# Altium PCB PCB.PcbDoc
Units mil, origin at the board's own origin, x right, y up, seen from the top; angles counter-clockwise.
Board outline 3785 x 1995 mil, 2 copper layers (Top Layer, Bottom Layer); 58 components, 44 nets, 203 pads, 0 vias.
Unrouted connection lines stored in the file: 107.
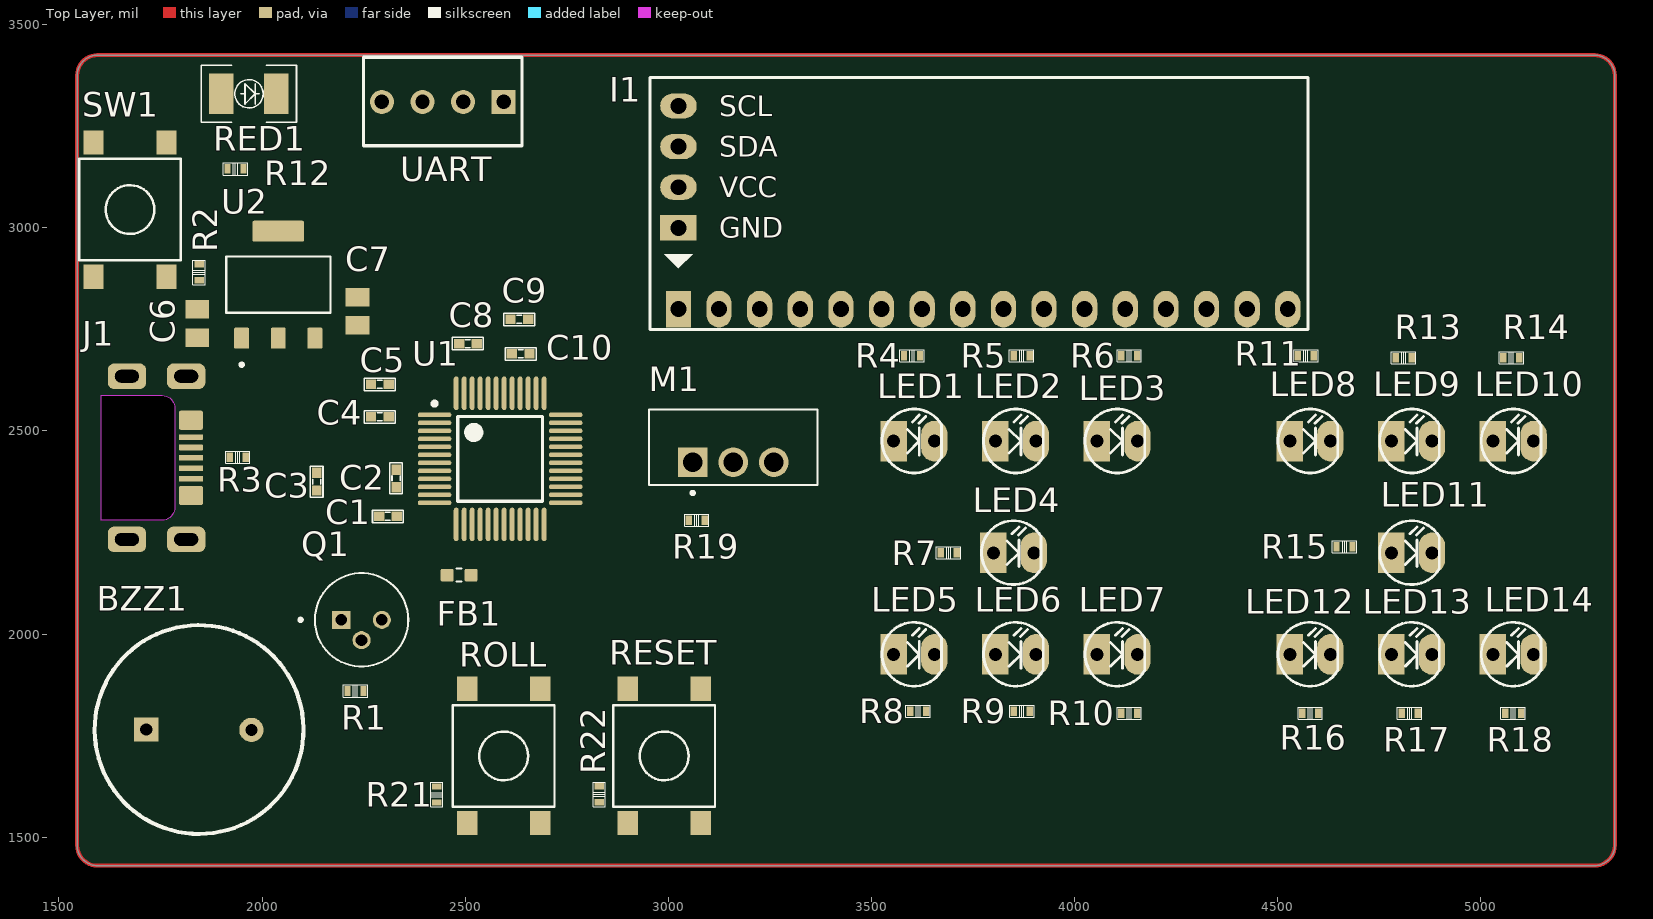
[diagram p0: Top Layer view]
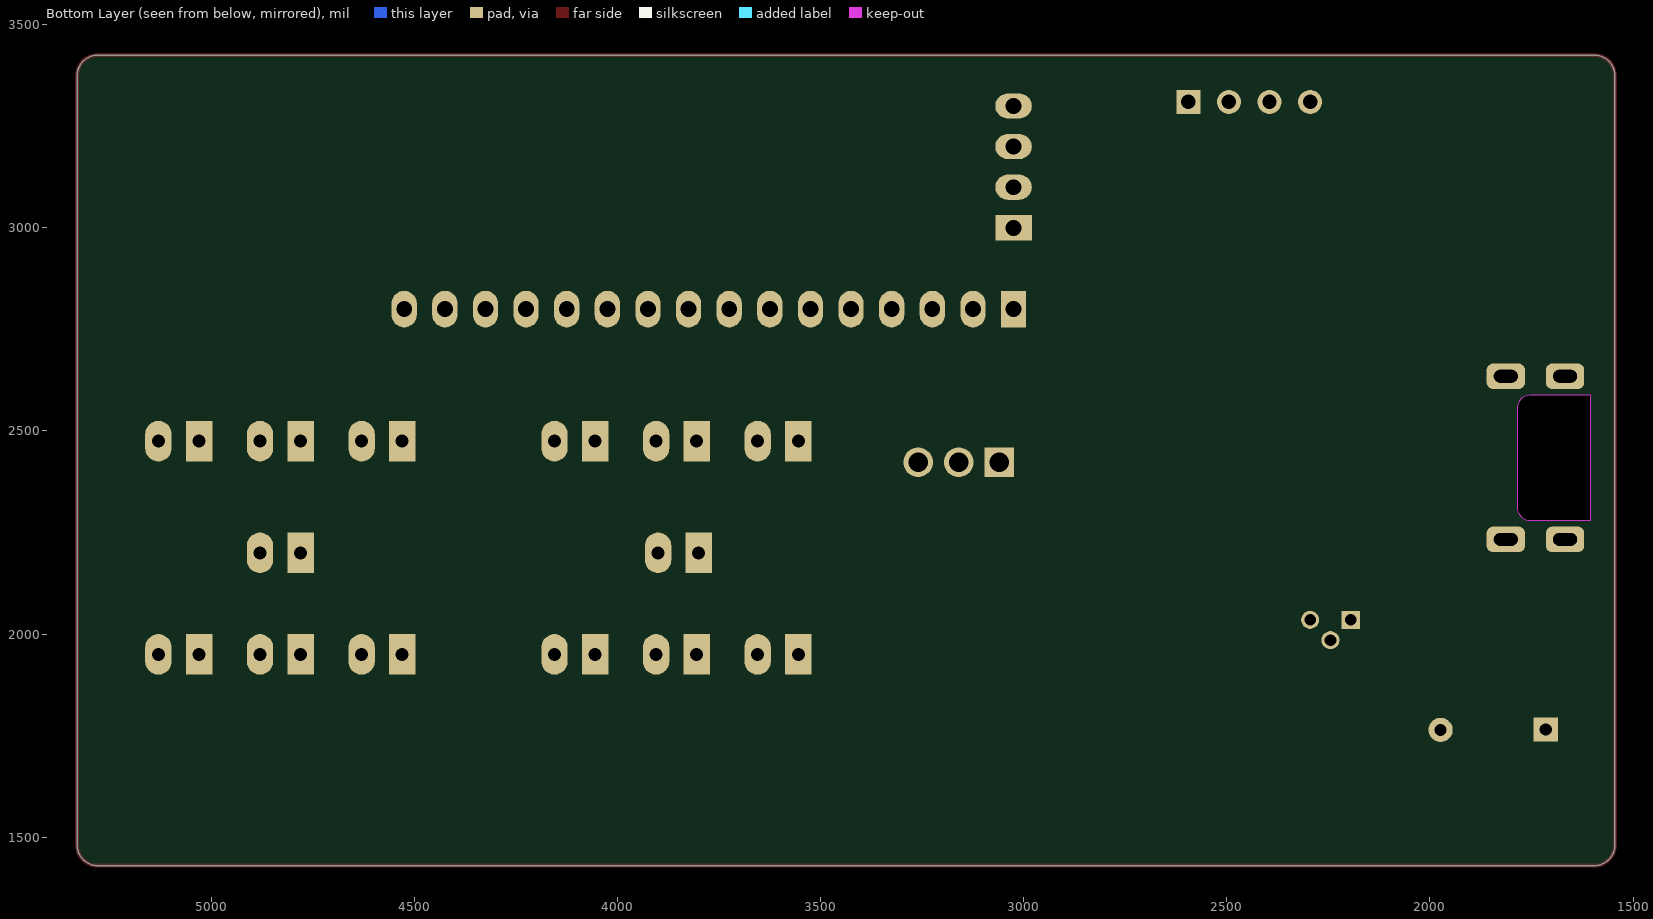
[diagram p1: Bottom Layer view, seen from below]

## Layer stack, top to bottom
Top Solder: solder mask 0.4, Solder Resist, Dk 3.5
Top Layer: signal copper 1.4
Dielectric 1: dielectric 12.6, FR-4, Dk 4.8
Bottom Layer: signal copper 1.4
Bottom Solder: solder mask 0.4, Solder Resist, Dk 3.5

## Board outline
1545,1480 1545,3375 cw(c1595,3375) 1595,3425 5280,3425 cw(c5280,3375) 5330,3375 5330,1480 cw(c5280,1480) 5280,1430 1595,1430 cw(c1595,1480)

## Design rules (kind name [scope] priority, off if disabled: settings)
Clearance [All] p1: gap=10 ignorepadtopadclearanceinfootprint=FALSE
PolygonConnect [All] p1: connectstyle=Relief reliefconductorwidth=10 reliefentries=4 polygonreliefangle="90 Angle" airgapwidth=10
RoutingVias [All] p1: holewidth=28 width=50 viastyle="Through Hole" minholewidth=28 minwidth=50 maxholewidth=28 maxwidth=50
SolderMaskExpansion [All] p1: expansion=4 istentingtop=FALSE
SupplyNets "Schematic Supply Nets_4" [InNet('VBUS')] p1: voltage=0.000
SupplyNets "Schematic Supply Nets_3" [InNet('+5')] p2: voltage=0.000
SupplyNets "Schematic Supply Nets_2" [InNet('+3.3V')] p3: voltage=0.000
SupplyNets "Schematic Supply Nets_1" [InNet('+3.3Va')] p4: voltage=0.000
SupplyNets "Schematic Supply Nets" [InNet('GND')] p5: voltage=0.000
Width [All] p1: maxlimit=10 minlimit=10 preferedwidth=10
30 further rules are at their usual default settings.

## Components (designator, comment, footprint, x,y, rotation, side; value= is the part's Value field where it differs from the comment)
BZZ1 "Buzzer" "buzzer 5V" 1845,1765 r0 top
C1 "Capacitor" "tu 0402" 2310,2290 r180 top value=100n
C2 "Capacitor" "tu 0402" 2330,2383.35 r90 top value=10u
C3 "Capacitor" "tu 0402" 2135,2375 r90 top value=100n
C4 "Capacitor" "tu 0402" 2290,2535 r180 top value=100n
C5 "Capacitor" "tu 0402" 2290,2615 r180 top value=100n
C6 "Capacitor" CAPC2012X94N 1840,2764.65 r90 top value=22u
C7 "Capacitor" CAPC2012X94N 2235,2795 r90 top value=22u
C8 "Capacitor" "tu 0402" 2506.65,2715 r0 top value=1u
C9 "Capacitor" "tu 0402" 2633.35,2775 r180 top value=1u
C10 "Capacitor" "tu 0402" 2636.65,2690 r180 top value=10n
FB1 "2K2 @ 100 MHz" FBC1608X95N 2485,2145 r0 top
I1 "I2C-LCD16x2" I2C-LCD16X2 3025,2800 r0 top value=LCD16x2A
J1 "USB M" USB-Micr-B-FCI-SMD 1604.53,2433.82 r270 top
LED1 "LED" LED-3 3555,2475 r0 top value="LED 3 ly Single Colour"
LED2 "LED" LED-3 3805,2475 r0 top value="LED 3 ly Single Colour"
LED3 "LED" LED-3 4055,2475 r0 top value="LED 3 ly Single Colour"
LED4 "LED" LED-3 3800,2200 r0 top value="LED 3 ly Single Colour"
LED5 "LED" LED-3 3555,1950 r0 top value="LED 3 ly Single Colour"
LED6 "LED" LED-3 3805,1950 r0 top value="LED 3 ly Single Colour"
LED7 "LED" LED-3 4055,1950 r0 top value="LED 3 ly Single Colour"
LED8 "LED" LED-3 4530,2475 r0 top value="LED 3 ly Single Colour"
LED9 "LED" LED-3 4780,2475 r0 top value="LED 3 ly Single Colour"
LED10 "LED" LED-3 5030,2475 r0 top value="LED 3 ly Single Colour"
LED11 "LED" LED-3 4780,2200 r0 top value="LED 3 ly Single Colour"
LED12 "LED" LED-3 4530,1950 r0 top value="LED 3 ly Single Colour"
LED13 "LED" LED-3 4780,1950 r0 top value="LED 3 ly Single Colour"
LED14 "LED" LED-3 5030,1950 r0 top value="LED 3 ly Single Colour"
M1 "N-channel MOS1 MOSFET Shichman and Hodges Model" TO254P1054X469X1930-3 3160,2460 r0 top
Q1 "2N2222A" TO127P584H533-3 2245,2035 r0 top
R1 "1K" RES-SMD-0402 2230,1860 r0 top
R2 "Thick Film" RES-SMD-0402 1845.01,2890.32 r90 top value=1k5
R3 "Thick Film" RES-SMD-0402 1940.31,2435.01 r180 top value=1k5
R4 "220" RES-SMD-0402 3600,2685 r0 top
R5 "220" RES-SMD-0402 3869.69,2684.99 r0 top
R6 "220" RES-SMD-0402 4134.69,2684.99 r0 top
R7 "220" RES-SMD-0402 3690,2200 r0 top
R8 "220" RES-SMD-0402 3615,1810 r0 top
R9 "220" RES-SMD-0402 3870.32,1809.99 r0 top
R10 "220" RES-SMD-0402 4134.69,1805.01 r180 top
R11 "220" RES-SMD-0402 4569.69,2685.01 r180 top
R12 "Thick Film" RES-SMD-0402 1934.68,3145.01 r180 top value=10K
R13 "220" RES-SMD-0402 4810,2680 r180 top
R14 "220" RES-SMD-0402 5075.31,2680.01 r180 top
R15 "220" RES-SMD-0402 4664.69,2215.01 r180 top
R16 "220" RES-SMD-0402 4580.31,1805.01 r180 top
R17 "220" RES-SMD-0402 4825,1805 r180 top
R18 "220" RES-SMD-0402 5079.69,1804.99 r0 top
R19 "Resistor" RES-SMD-0402 3070,2280 r180 top value=10K
R21 "Resistor" RES-SMD-0402 2430,1605 r90 top value=10K
R22 "Resistor" RES-SMD-0402 2830.01,1605.32 r90 top value=10K
RED1 "Light-Emitting Diode" LED-RED-0805 1900,3330 r0 top
RESET "Push Button Normally Opened" SW4_SMD 2990,1700 r90 top (schematic designator S2)
ROLL "Push Button Normally Opened" SW4_SMD 2595,1700 r90 top (schematic designator S1)
SW1 "ON-ON" SW4_SMD 1675,3045 r90 top
U1 "STM32F103C8T6TR" STM-LQFP48_M 2586.1,2431.42 r0 top
U2 "Positive Fixed Voltage regulator" AMS1117_3v3 2020,2865 r90 top
UART "USART" HDR4 2595,3310 r180 top (schematic designator C11)

## Footprints (in the part's own frame and the unit in brackets; to place one, negate y for a bottom-side part, rotate by r counter-clockwise, add the part's x,y. Pads: shape width x height; smd on the part's side, far side on the other; paste and mask are expansions set on the pad)
AMS1117_3v3 [mm]
  rrect15% 1.31x0.93 smd: 1(-3.472,1.782) 2(-3.472,-0.508) 3(-3.472,-2.798)
  rrect15% 1.31x3.24 smd: 4(3.218,-0.508)
  silkscreen extent -5.23,-3.76 1.63,2.74, body extent -3.63,-3.76 3.37,2.74, height 1.8
"buzzer 5V" [mil]
  rect 60x60 hole 30: 1(-130,0)
  round 60 hole 30: 2(129,-1)
  silkscreen extent -257,-257 257,257, body extent -236,-236 236,236, height 345
CAPC2012X94N [mm]
  rect 1.16x1.47 smd: 1(-0.88,0) 2(0.88,0)
  body extent -1,-0.63 1,0.63, height 0.94
FBC1608X95N [mm] "Chip Ferrite, Body 1.6x0.8mm, 0603, IPC Medium Density"
  round 0.254 on Mech15: 0(0,0)
  rrect25% 0.8x0.8 smd: 1(-0.75,0) 2(0.75,0)
  Top Layer pour cut-out: -0.6,0.5 -0.4,0.7 0.4,0.7 0.6,0.5 0.6,-0.5 0.4,-0.7 -0.4,-0.7 -0.6,-0.5
  silkscreen extent -0.15,-0.41 0.15,0.41, body extent -0.87,-0.47 0.88,0.48, height 0.95
HDR4 [mm] "Connector; Header; 4 Position"
  rect 1.5x1.5 hole 0.9: 1(0,0)
  round 1.5 hole 0.9: 2(2.54,0) 3(5.08,0) 4(7.62,0)
  silkscreen extent -1.14,-2.79 8.76,2.74, body extent -1.27,-2.92 8.89,2.88, height 11.72
I2C-LCD16X2 [mil] "LCD dipslay 16x2, 16 pin"
  rect 62x90 hole 39: 1(0,0)
  oval 62x90 hole 39: 2(100,0) 3(200,0) 4(300,0) 5(400,0) 6(500,0) 7(600,0) 8(700,0) 9(800,0) 10(900,0) 11(1000,0) 12(1100,0) 13(1200,0) 14(1300,0) 15(1400,0) 16(1500,0)
  oval 90x62 hole 39: 17(0,500) 18(0,400) 19(0,300)
  rect 90x62 hole 39: 20(0,200)
  silkscreen extent -70,-50 1550,570
LED-3 [mil] "LED 2 PIN, 3ly Only colour"
  rect 65x100 hole 32: 1(0,0)
  oval 65x100 hole 32: 2(100,0)
  silkscreen extent -29,-78 118,79, body extent -29,-75 109,75, height 256
LED-RED-0805 [mil]
  rect 60x100 smd: 1(0,0) 2(135,0)
  silkscreen extent -50,-70 185,70, body extent -20,-60 154,60, height 75
RES-SMD-0402 [mm]
  rect 0.4x0.6 smd: 1(-0.5,0) 2(0.5,0)
  silkscreen extent -0.76,-0.38 0.76,0.38, body extent -0.5,-0.25 0.5,0.25, height 0.35
STM-LQFP48_M [mm] "QFP, 48-Leads, Body 7x7mm, Pitch 0.5mm, IPC Low Density"
  oval 2.1x0.3 smd: 1(-4.1,2.75) 2(-4.1,2.25) 3(-4.1,1.75) 4(-4.1,1.25) 5(-4.1,0.75) 6(-4.1,0.25) 7(-4.1,-0.25) 8(-4.1,-0.75) 9(-4.1,-1.25) 10(-4.1,-1.75) 11(-4.1,-2.25) 12(-4.1,-2.75) 25(4.1,-2.75) 26(4.1,-2.25) 27(4.1,-1.75) 28(4.1,-1.25) 29(4.1,-0.75) 30(4.1,-0.25) 31(4.1,0.25) 32(4.1,0.75) 33(4.1,1.25) 34(4.1,1.75) 35(4.1,2.25) 36(4.1,2.75)
  oval 0.3x2.1 smd: 13(-2.75,-4.1) 14(-2.25,-4.1) 15(-1.75,-4.1) 16(-1.25,-4.1) 17(-0.75,-4.1) 18(-0.25,-4.1) 19(0.25,-4.1) 20(0.75,-4.1) 21(1.25,-4.1) 22(1.75,-4.1) 23(2.25,-4.1) 24(2.75,-4.1) 37(2.75,4.1) 38(2.25,4.1) 39(1.75,4.1) 40(1.25,4.1) 41(0.75,4.1) 42(0.25,4.1) 43(-0.25,4.1) 44(-0.75,4.1) 45(-1.25,4.1) 46(-1.75,4.1) 47(-2.25,4.1) 48(-2.75,4.1)
  silkscreen extent -4.22,-2.65 2.65,3.57, body extent -4.51,-4.51 4.51,4.51, height 1.6
SW4_SMD [mil] "SW SMD button 4pin, 250 x250 mil"
  rect 60x50 smd: 1(-165,90) 2(165,-90) 3(165,90) 4(-165,-90)
  silkscreen extent -125,-125 125,125, body extent -180,-125 180,125, height 130
TO127P584H533-3 [mm]
  rect 1.13x1.13 / inner round 1.13 / far side rect 1.13x1.13 hole 0.73 mask+0.102: 1(-1.27,0)
  round 1.13 hole 0.73 mask+0.102: 2(0,-1.27) 3(1.27,0)
  silkscreen extent -3.91,-2.92 2.92,2.92, body extent -3.02,-2.79 2.79,3.02, height 5.33
TO254P1054X469X1930-3 [mm]
  rect 1.85x1.85 / inner round 1.85 / far side rect 1.85x1.85 hole 1.23: 1(-2.54,-0.94)
  round 1.85 hole 1.23: 2(0,-0.94) 3(2.54,-0.94)
  silkscreen extent -5.27,-2.96 5.27,2.35, body extent -5.08,-1.71 5.08,2.73, height 15.01
"tu 0402" [mm]
  rect 0.65x0.6 smd: 1(-0.55,0) 2(0.55,0)
  silkscreen extent -0.97,-0.38 0.97,0.41, body extent -0.5,-0.27 0.5,0.26, height 0.35
USB-Micr-B-FCI-SMD [mm]
  round 0.508 on Mech15: 0(0,0)
  rrect20% 0.35x1.5 smd: 1(-1.3,5.6) 2(-0.65,5.6) 3(0,5.6) 4(0.65,5.6) 5(1.3,5.6)
  rrect50% 1.6x2.4 hole 0.8 slot 1.5 at 90 deg: SH(-5.1,5.3) SH(-5.1,1.6) SH(5.1,5.3) SH(5.1,1.6)
  rrect20% 1.2x1.5 smd: SH(-2.35,5.6) SH(2.35,5.6)
  Keep-Out Layer board cut-out: -3.9,0 -3.9,3.797 -3.839,4.103 -3.666,4.362 -3.406,4.536 -3.1,4.597 -3.1,4.597 3.1,4.597 3.406,4.536 3.666,4.362 3.839,4.103 3.9,3.797 3.9,3.797 3.9,0
  body extent -5.25,-1.12 5.25,5.8, height 2.15

## Part data
FB1: library part FERRITE_2K2-100MHz_0603, "Ferrite bead 120 Ohm at 100 MHz 200mA 0603 SMD", Current Rating=200mA, DC Resistance (DCR)="800 mOhm Max", Impedance @ Frequency="2200 Ohm @ 100MHz", Manufacturer 1="TDK Corporation", Manufacturer Part Number 1=MMZ1608A222B, Package / Case="0603 (1608 Metric)", Ratings="200 mA; 800 mOhm DC", Supplier Part Number 1=445-8671-1-ND, ComponentLink1Description=http://www.tdk.co.jp/tefe02/e9412_mmz.pdf, ComponentLink1URL=http://www.tdk.co.jp/tefe02/e9412_mmz.pdf, Filter Type="Differential Mode - Single", Height (Max)="0.037\" (0.95mm)", Mounting Type="Surface Mount", RoHS 1="RoHS Compliant", SCDType=source, Size / Dimension="0.063\" L x 0.031\" W (1.60mm x 0.80mm)", Supplier 1=Digi-Key
I1: "LCD dipslay 16 char, 2 line"
LED1 LED2 LED3 LED4 LED5 LED6 LED7 LED8 LED9 LED10 LED11 LED12 LED13 LED14: "LED Single colour Green and Red"
M1: library part "MOSFET N-ch Lev1", CBD=0, CBS=0, CGBO=0, CGDO=0, CGSO=0, CJ=0, CJSW=0, FC=0.5, GAMMA=0, IS=1e-14, JS=0, KP=2e-05, LAMBDA=0, LD=0, MJ=0.5, MJSW=0.5, NSS=0, NSUB=0, PB=0.8, PHI=0.6, RD=0, RS=0, RSH=0, SimulationGenericComponent=True, TNOM=27, TOX=0, TPG=0, U0=0, VTO=0
Q1: "Bipolar (BJT) Transistor NPN 50 V 800 mA - 500 mW Surface Mount 4-SMD", PACKAGE=None, Check_prices=https://www.snapeda.com/parts/2N2222A/Microsemi/view-part/?ref=eda, MF="Microsemi Corporation", MP=2N2222A, SnapEDA_Link=https://www.snapeda.com/parts/2N2222A/Microsemi/view-part/?ref=snap
R1 R4 R5 R6 R7 R8 R9 R10 R11 R13 R14 R15 R16 R17 R18: library part Res, "Res"
R2 R3 R12: library part RES_0402, "Resistor SMD chip 1k Ohm 0.063W 5% 0402", Manufacturer 1=Yageo, Manufacturer 2="Vishay Dale", Manufacturer 3="Samsung Electro-Mechanics America, Inc", Manufacturer 4="Rohm Semiconductor", Manufacturer 5="Panasonic Electronic Components", Manufacturer Part Number 1=RC0402JR-071KL, Manufacturer Part Number 2=CRCW04021K00JNED, Manufacturer Part Number 3=RC1005J102CS, Manufacturer Part Number 4=MCR01MRTJ102, Manufacturer Part Number 5=ERJ-2GEJ102X, Package / Case="0402 (1005 Metric)", Ratings="1/16 W", Supplier Part Number 1=311-1.0KJRCT-ND, Tolerance=±5%, ComponentLink1Description=http://www.yageo.com/documents/recent/PYu-RC0402_51_RoHS_L_6.pdf, ComponentLink1URL=http://www.yageo.com/documents/recent/PYu-RC0402_51_RoHS_L_6.pdf, ComponentLink2Description=http://www.vishay.com/doc?20035, ComponentLink2URL=http://www.vishay.com/doc?20035, ComponentLink3Description=http://www.samsungsem.com/servlet/FileDownload?filename=productcatalog/pdf/Chip_Resistor.pdf, ComponentLink3URL=http://www.samsungsem.com/servlet/FileDownload?filename=productcatalog/pdf/Chip_Resistor.pdf, ComponentLink4Description=http://rohmfs.rohm.com/en/products/databook/datasheet/passive/resistor/chip_resistor/mcr_g.pdf, ComponentLink4URL=http://rohmfs.rohm.com/en/products/databook/datasheet/passive/resistor/chip_resistor/mcr_g.pdf, ComponentLink5Description=http://industrial.panasonic.com/www-cgi/jvcr13pz.cgi?E+PZ+3+AOA0001+ERJ2GEJ102X+7+WW, ComponentLink5URL=http://industrial.panasonic.com/www-cgi/jvcr13pz.cgi?E+PZ+3+AOA0001+ERJ2GEJ102X+7+WW, RoHS 1="RoHS Compliant", RoHS 2="RoHS Compliant", RoHS 3="RoHS Compliant", RoHS 4="RoHS Compliant", RoHS 5="RoHS Compliant", SCDType=spec, Supplier 1=Digi-Key, Supplier 2=Digi-Key, Supplier 3=Digi-Key, Supplier 4=Digi-Key, Supplier 5=Digi-Key, Supplier Part Number 2=541-1.0KJCT-ND, Supplier Part Number 3=1276-4376-1-ND, Supplier Part Number 4=RHM1.0KCECT-ND, Supplier Part Number 5=P1.0KJCT-ND
RED1: library part LED, AF=1, BV=0, BV_MAX=1e99, CJO=0, CJP=0, CTA=0, CTP=0, EG=1.11, FC=0.5, FCS=0.5, FV_MAX=1e99, IBV=0.001, IKF=0, IKR=0, IS=1e-14, ISR=1e-14, JSW=0, JTUN=0, JTUNSW=0, KEG=1, KF=0, LEVEL=1, MJSW=0.33, N=1, NBV=1, NR=1, NS=1, NTUN=30, PHP=1, RS=0, SimulationGenericComponent=True, TCV=0, TLEV=0, TLEVC=0, TM1=0, TM2=0, TNOM=27, TPB=0, TPHP=0, TRS=0, TRS2=0, TT=0, TTT1=0, TTT2=0, VJ=1, XTI=3, XTITUN=3
RESET ROLL: library part "Push Button NO", closed=0, Rclosed=1m, Ropen=1Meg, SimulationGenericComponent=True
SW1: library part SW_THD_SPDT_On-On, "Switch THD vertical toggle SPDT", Contact Rating @ Voltage="0.25A @ 125VAC", Manufacturer 1="TE Connectivity", Manufacturer Part Number 1=SLS121PC04, Supplier Part Number 1=450-1598-ND, Circuit=SPDT, Mounting Type="PCB mount", SCDType=spec, Supplier 1=Digi-Key, Switch Function=On-On
U1: "ARM Cortex-M3 32-bit MCU, 64 KB Flash, 20 KB Internal RAM, 37 I/Os, 48-pin LQFP, -40 to 85 degC, Tape and Reel", PACKAGE=LQFP48
U2: library part "Linear Voltage Regulator (Fixed)", R1_Value=1020, Av_feedback=1665, SimulationGenericComponent=True
UART: library part Header4, "Header IDC, 4 x 1 Pin Vertical 2.54mm Pitch (Non-Boxed, Male)", Manufacturer="W¨¹rth Elektronik eiSos GmbH", partNo=613002143121, ComponentLink1 Description=Manufacturer, ComponentLink1URL=http://www.we-online.com, ComponentLink2 Description=Datasheet, ComponentLink2URL=http://katalog.we-online.de/em/datasheet/6130xx143121.pdf, Created by="Karrer Zheng", Created Date="29 March 2013", NoPins=02
C1 C2 C3 C4 C5 C6 C7 C8 C9 C10: SimulationGenericComponent=True
R19 R21 R22: SimulationGenericComponent=True, TC1=0, TC2=0

## Nets (pads, with @x,y where several pads share a name; then routed paths per layer and width w, separated by ;. In a path a pad name is that pad's centre, name@x,y a point inside that pad or via, vN(x,y) a via of type N, cw(c..) or ccw(c..) an arc to the next point about the centre after c; other vN are vias at no path point)
+3.3V: BZZ1.1 C1.1 C2.1 C3.1 C4.1 C5.1 C7.1 C8.1 FB1.2 R3.1 RED1.1 SW1.3 U1.1 U1.24 U1.36 U1.48 U2.3 UART.1
+3.3Va: C9.1 C10.1 FB1.1 U1.9
+5: I1.19 RESET.2 ROLL.2
BUTT_1: R21.2 ROLL.1 U1.13
BUTT_2: R22.2 RESET.1 U1.14
BZZ: R1.2 U1.20
GND: C6.2 C7.2 C8.2 C9.2 C10.2 I1.20 J1.5 M1.3 Q1.1 R2.1 R21.1 R22.1 SW1.1 U1.8 U1.23 U1.35 U1.47 U2.2 UART.4
I2C_SCL: I1.17 I1.18 U1.42
I2C_SDA: U1.43
LED_1: R4.2 R7.2 U1.46
LED_2: R5.2 R8.2 U1.21
LED_3: R6.2 R9.2 U1.22
LED_4: R10.2 R11.2 U1.25
LED_5: R13.1 R16.1 U1.26
LED_6: R14.1 R17.1 U1.27
LED_7: R15.1 R18.1 U1.28
MOS: R19.2 U1.18
NetBZZ1_2: BZZ1.2 Q1.3
NetC1_2: C1.2 C2.2 C3.2 C4.2 C5.2
NetC11_2: U1.30 UART.2
NetC11_3: U1.31 UART.3
NetLED1_1: LED1.1 R4.1
NetLED1_2: LED1.2 LED2.2 LED3.2 LED4.2 LED5.2 LED6.2 LED7.2 LED8.2 LED9.2 LED10.2 LED11.2 LED12.2 LED13.2 LED14.2 M1.1
NetLED2_1: LED2.1 R5.1
NetLED3_1: LED3.1 R6.1
NetLED4_1: LED4.1 R7.1
NetLED5_1: LED5.1 R8.1
NetLED6_1: LED6.1 R9.1
NetLED7_1: LED7.1 R10.1
NetLED8_1: LED8.1 R11.1
NetLED9_1: LED9.1 R13.2
NetLED10_1: LED10.1 R14.2
NetLED11_1: LED11.1 R15.2
NetLED12_1: LED12.1 R16.2
NetLED13_1: LED13.1 R17.2
NetLED14_1: LED14.1 R18.2
NetM1_2: M1.2 R19.1
NetQ1_2: Q1.2 R1.1
NetR2_2: R2.2 RED1.2
NetR12_1: R12.1 U1.44
SW_BOOT0: R12.2 SW1.2
USB_D_N: J1.2 U1.32
USB_D_P: J1.3 R3.2 U1.33
VBUS: C6.1 J1.1 U2.1
pads on no net: FB1.0 I1.1 I1.2 I1.3 I1.4 I1.5 I1.6 I1.7 I1.8 I1.9 I1.10 I1.11 I1.12 I1.13 I1.14 I1.15 I1.16 J1.0 J1.4 J1.SH RESET.3 RESET.4 ROLL.3 ROLL.4 SW1.4 U1.2 U1.3 U1.4 U1.5 U1.6 U1.7 U1.10 U1.11 U1.12 U1.15 U1.16 U1.17 U1.19 U1.29 U1.34 U1.37 U1.38 U1.39 U1.40 U1.41 U1.45 U2.4
copper on no net: | length 11474.2
  Top Layer w10: 1545,1480 ccw(c1595,1480) 1595,1430 1605,1430 5280,1430 ccw(c5280,1480) 5330,1480 5330,3375 ccw(c5280,3375) 5280,3425 1595,3425 ccw(c1595,3375) 1545,3375 1545,1480

## Text inside footprints (layer, text, board x,y; h text height)
I1: Top Overlay "SCL" at 3125,3275 h50; Top Overlay "SDA" at 3125,3175 h50; Top Overlay "VCC" at 3125,3075 h50; Top Overlay "GND" at 3125,2975 h50